# EAGLE board moire_v1.5-routed (EAGLE 9.2.0)
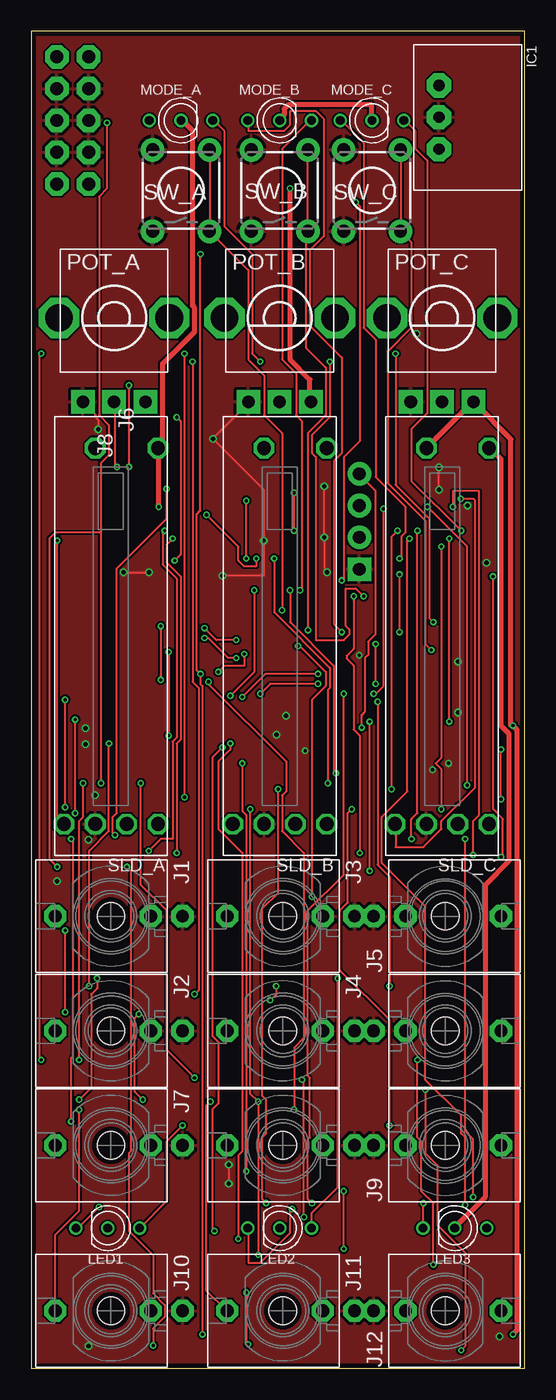
[diagram p0: board, top side]
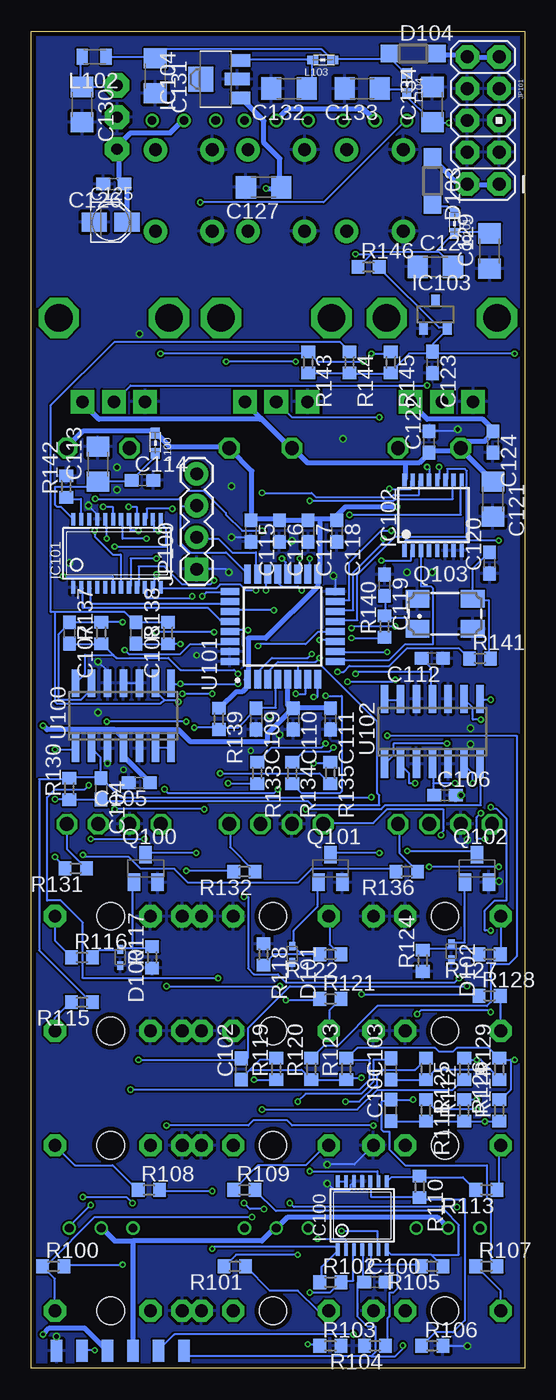
[diagram p1: board, bottom side, seen from below]

Size 39.35 x 106.68 mm. Coordinates in mm from the lower left corner, seen from the top.
Outline: 0,0 39.35,0 39.35,106.68 0,106.68 0,0
Copper layers (1*16): Top 0.035559375mm / dielectric 1.6mm / Bottom 0.035559375mm
Design rules "oshpark-2layer *": minimum track width 6mil, minimum drill 10mil, track to track 6mil, track to pad 6mil, pad to pad 6mil, via to via 6mil, smd to smd 0mil, copper to edge 15mil, drill to drill 6mil, minimum pad ring 5mil, minimum via ring 5mil, stop-mask expansion 2.5mil, vias tented up to drill 0mil, thermal gap 10mil
Net classes: 1 power: width 0.406 mm

## Footprints (pad centres in the part's own frame; a part is rotated, then mirrored left to right if it is on the bottom)
C0603 = smd 1.1 x 1: 1 -0.85,0; 2 0.85,0
C1206 = smd 1.6 x 1.8: 1 -1.4,0; 2 1.4,0
PANASONIC_A = smd 2 x 1.5: + 1.3,0; - -1.3,0
SOD523 = smd 0.7 x 0.5: A 0.7,0; C -0.6,0
SOD123 = smd 1.4 x 1.4: A 1.9,0; C -1.9,0
WE78 = drill 0.9 pad 1.93 octagon: 1 -2.54,0; 2 0,0; 3 2.54,0
TSSOP14_065 = smd 0.305 x 0.991: 1 -1.95,-2.718; 2 -1.3,-2.718; 3 -0.65,-2.718; 4 0,-2.718; 5 0.65,-2.718; 6 1.3,-2.718; 7 1.95,-2.718; 8 1.95,2.718; 9 1.3,2.718; 10 0.65,2.718; 11 0,2.718; 12 -0.65,2.718; 13 -1.3,2.718; 14 -1.95,2.718
TSSOP24_0635 = smd 0.33 x 1: 1 -3.493,-2.725; 2 -2.857,-2.725; 3 -2.223,-2.725; 4 -1.587,-2.725; 5 -0.953,-2.725; 6 -0.318,-2.725; 7 0.318,-2.725; 8 0.953,-2.725; 9 1.587,-2.725; 10 2.223,-2.725; 11 2.857,-2.725; 12 3.493,-2.725; 13 3.493,2.725; 14 2.857,2.725; 15 2.223,2.725; 16 1.587,2.725; 17 0.953,2.725; 18 0.318,2.725; 19 -0.318,2.725; 20 -0.953,2.725; 21 -1.587,2.725; 22 -2.223,2.725; 23 -2.857,2.725; 24 -3.493,2.725
TSSOP16_065 = smd 0.35 x 1: 1 -1.95,-2.825; 2 -1.3,-2.825; 3 -0.65,-2.825; 4 0,-2.825; 5 0.65,-2.825; 6 1.3,-2.825; 7 1.95,-2.825; 8 2.6,-2.825; 9 2.6,2.825; 10 1.95,2.825; 11 1.3,2.825; 12 0.65,2.825; 13 0,2.825; 14 -0.65,2.825; 15 -1.3,2.825; 16 -1.95,2.825
DBZ_R-PDSO-G3 = smd 0.7 x 1: 1 -0.95,-1.1; 2 0.95,-1.1; 3 0,1.1
SOT89 = smd 1 x 1.5: 1 -1.499,-1.981; 3 1.499,-1.981 | smd 1 x 2: 2 0,-1.727 | smd 2 x 2: 2@1 0,1.194
WQP_PJ_301M6 = drill 1.016 pad 1.778 octagon: P1 0,-5.715; P2 0,-3.175; P3 0,4.445 | hole 2.2: 0,0
1X04 = drill 1.016 pad 1.88 square: 1 0,0 | drill 1.016 pad 1.88: 2 2.54,0; 3 5.08,0; 4 7.62,0
2X5-PTH = drill 1.016 pad 1.88 octagon: 1 -1.27,5.08; 2 1.27,5.08; 3 -1.27,2.54; 4 1.27,2.54; 5 -1.27,0; 6 1.27,0; 7 -1.27,-2.54; 8 1.27,-2.54; 9 -1.27,-5.08; 10 1.27,-5.08
0603 = smd 0.85 x 0.7: 1 -0.9,0; 2 0.7,0
L2012C = smd 0.9 x 1.25: 1 -0.9,0; 2 1,0
LED-BICOLOR-THROUGHHOLE-LUMEX = drill 0.7: A 0,0; GREEN_C 2.54,0; RED_C -2.54,0
ALPS_POT_VERTICAL = drill 1 pad 1.88 square: P$1 -2.5,6.7; P$2 0,6.7; P$3 2.5,6.7 | drill 2.2 pad 3.175 octagon: P$4 -4.4,0; P$5 4.4,0
SOT23-BEC = smd 1 x 1.4: B -0.95,-1.1; C 0,1.1; E 0.95,-1.1
CTS406 = smd 1.9 x 1.4: 1 -2.2,-1.2; 2 2.2,-1.2; 3 2.2,1.2; 4 -2.2,1.2
R0603 = smd 1 x 1.1: 1 -0.85,0; 2 0.85,0
BOURNS_SLIDER = drill 1.1 octagon: 1 -15,1.25; 2 -15,3.75; 3 15,1.25; B 15,-3.75; DUMMY -15,-1.25; E -15,-3.75
TACTILE-PTH = drill 1.016 pad 1.88: 1 -3.251,2.261; 2 3.251,2.261; 3 -3.251,-2.261; 4 3.251,-2.261
SO14 = smd 0.6 x 2.2: 1 -3.81,-2.6; 2 -2.54,-2.6; 3 -1.27,-2.6; 4 0,-2.6; 5 1.27,-2.6; 6 2.54,-2.6; 7 3.81,-2.6; 8 3.81,2.6; 9 2.54,2.6; 10 1.27,2.6; 11 0,2.6; 12 -1.27,2.6; 13 -2.54,2.6; 14 -3.81,2.6
QFP80P900X900X160-32N = smd 1.5 x 0.55: 1 -4.2,2.8; 2 -4.2,2; 3 -4.2,1.2; 4 -4.2,0.4; 5 -4.2,-0.4; 6 -4.2,-1.2; 7 -4.2,-2; 8 -4.2,-2.8; 17 4.2,-2.8; 18 4.2,-2; 19 4.2,-1.2; 20 4.2,-0.4; 21 4.2,0.4; 22 4.2,1.2; 23 4.2,2; 24 4.2,2.8 | smd 0.55 x 1.5: 9 -2.8,-4.2; 10 -2,-4.2; 11 -1.2,-4.2; 12 -0.4,-4.2; 13 0.4,-4.2; 14 1.2,-4.2; 15 2,-4.2; 16 2.8,-4.2; 25 2.8,4.2; 26 2,4.2; 27 1.2,4.2; 28 0.4,4.2; 29 -0.4,4.2; 30 -1.2,4.2; 31 -2,4.2; 32 -2.8,4.2
6X1-SMD-TESTPAD = smd 0.914 x 1.778: 1 0,0.123; 2 -2.032,0.123; 3 -4.064,0.123; 4 -6.096,0.123; 5 -8.128,0.123; 6 -10.16,0.123

## Placement (x,y rotation side)
C100  100n  [C0603]  11.94,6.86 0 bottom
C101  100p  [C0603]  10.67,20.57 90 bottom
C102  100p  [C0603]  22.61,23.88 90 bottom
C103  100p  [C0603]  10.67,23.88 90 bottom
C104  2.2n  [C0603]  33.78,46.23 270 bottom
C105  100n  [C0603]  30.73,46.74 180 bottom
C106  100n  [C0603]  6.35,45.72 0 bottom
C107  2.2n  [C0603]  36.32,58.67 270 bottom
C108  2.2n  [C0603]  30.99,58.67 270 bottom
C109  100n  [C0603]  21.42,51.82 270 bottom
C110  100n  [C0603]  18.46,51.82 270 bottom
C111  1u  [C0603]  15.49,51.82 270 bottom
C112  100n  [C0603]  7.37,56.64 180 bottom
C113  22u  [C1206]  34.04,72.14 90 bottom
C114  100n  [C0603]  30.48,70.87 0 bottom
C115  100n  [C0603]  21.84,66.8 270 bottom
C116  100n  [C0603]  19.56,66.8 270 bottom
C117  1u  [C0603]  17.27,66.8 270 bottom
C118  1u  [C0603]  14.99,66.8 270 bottom
C119  20p  [C0603]  11.18,62.48 270 bottom
C120  20p  [C0603]  2.79,64.26 90 bottom
C121  22u  [C1206]  2.54,69.34 270 bottom
C122  100n  [C0603]  7.62,73.91 90 bottom
C123  1u  [C0603]  7.37,80.26 270 bottom
C124  100n  [C0603]  2.54,73.91 270 bottom
C125  10u  [PANASONIC_A]  33.02,91.44 0 bottom
C126  100n  [C0603]  32.77,94.49 180 bottom
C127  22u  [C1206]  20.83,94.23 180 bottom
C128  22u  [C1206]  7.11,87.88 0 bottom
C129  22u  [C1206]  2.79,89.15 90 bottom
C130  22u  [C1206]  35.31,100.84 270 bottom
C131  22u  [C1206]  29.46,103.12 270 bottom
C132  22u  [C1206]  18.8,102.11 180 bottom
C133  22u  [C1206]  12.95,102.11 180 bottom
C134  22u  [C1206]  7.37,100.84 90 bottom
D100  1N4148  [SOD523]  32.26,32.83 270 bottom
D101  1N4148  [SOD523]  18.54,33.07 270 bottom
D102  1N4148  [SOD523]  5.84,33.27 270 bottom
D103  1N5819HW  [SOD123]  7.37,94.74 270 bottom
D104  1N5819HW  [SOD123]  8.89,104.9 0 bottom
IC1  R-78E3.3-0.5  [WE78]  32.51,99.82 270 top
IC100  LM324PW  [TSSOP14_065]  12.95,12.19 0 bottom
IC101  TLC59281DBQ  [TSSOP24_0635]  32.51,65.02 0 bottom
IC102  4051PW  [TSSOP16_065]  7.62,68.07 0 bottom
IC103  LM4040B25  [DBZ_R-PDSO-G3]  7.11,84.07 0 bottom
IC104  LD2981ABU33  [SOT89]  24.64,102.87 90 bottom
J1  PJ301_THONKICONN6  [WQP_PJ_301M6]  6.35,36.07 90 top
J2  PJ301_THONKICONN6  [WQP_PJ_301M6]  6.35,26.92 90 top
J3  PJ301_THONKICONN6  [WQP_PJ_301M6]  20.07,36.07 90 top
J4  PJ301_THONKICONN6  [WQP_PJ_301M6]  20.07,26.92 90 top
J5  PJ301_THONKICONN6  [WQP_PJ_301M6]  33.02,36.07 270 top
J6  PJ301_THONKICONN6  [WQP_PJ_301M6]  33.02,26.92 270 top
J7  PJ301_THONKICONN6  [WQP_PJ_301M6]  6.35,17.78 90 top
J8  PJ301_THONKICONN6  [WQP_PJ_301M6]  20.07,17.78 90 top
J9  PJ301_THONKICONN6  [WQP_PJ_301M6]  33.02,17.78 270 top
J10  PJ301_THONKICONN6  [WQP_PJ_301M6]  6.35,4.57 90 top
J11  PJ301_THONKICONN6  [WQP_PJ_301M6]  20.07,4.57 90 top
J12  PJ301_THONKICONN6  [WQP_PJ_301M6]  33.02,4.57 270 top
JP100  [1X04]  26.16,63.75 90 bottom
JP101  M05X2PTH  [2X5-PTH]  3.3,99.57 180 bottom
L100  [0603]  29.46,73.91 90 bottom
L101  [0603]  5.59,91.44 90 bottom
L102  33u  [L2012C]  34.29,104.65 180 bottom
L103  [0603]  16,104.39 0 bottom
L104  [0603]  9.4,102.62 90 bottom
LED1  SSL-LX3059IGW-CA  [LED-BICOLOR-THROUGHHOLE-LUMEX]  6.1,11.18 0 top
LED2  SSL-LX3059IGW-CA  [LED-BICOLOR-THROUGHHOLE-LUMEX]  19.81,11.18 0 top
LED3  SSL-LX3059IGW-CA  [LED-BICOLOR-THROUGHHOLE-LUMEX]  33.78,11.18 0 top
MODE_A  SSL-LX3059IGW-CA  [LED-BICOLOR-THROUGHHOLE-LUMEX]  11.94,99.57 180 top
MODE_B  SSL-LX3059IGW-CA  [LED-BICOLOR-THROUGHHOLE-LUMEX]  19.81,99.57 180 top
MODE_C  SSL-LX3059IGW-CA  [LED-BICOLOR-THROUGHHOLE-LUMEX]  27.18,99.57 180 top
POT_A  10kB  [ALPS_POT_VERTICAL]  6.6,83.82 180 top
POT_B  10kB  [ALPS_POT_VERTICAL]  19.81,83.82 180 top
POT_C  10kB  [ALPS_POT_VERTICAL]  32.77,83.82 180 top
Q100  MMBT3904  [SOT23-BEC]  30.23,39.88 0 bottom
Q101  MMBT3904  [SOT23-BEC]  15.49,39.88 0 bottom
Q102  MMBT3904  [SOT23-BEC]  3.81,39.88 0 bottom
Q103  8MHz  [CTS406]  6.35,60.2 0 bottom
R100  1.0k  [R0603]  37.59,8.13 0 bottom
R101  1.0k  [R0603]  23.11,8.13 180 bottom
R102  100k  [R0603]  15.49,6.86 0 bottom
R103  69.8k  [R0603]  15.49,1.78 0 bottom
R104  69.8k  [R0603]  11.94,1.78 180 bottom
R105  100k  [R0603]  7.37,8.13 180 bottom
R106  69.8k  [R0603]  7.37,1.78 0 bottom
R107  1.0k  [R0603]  3.05,8.13 0 bottom
R108  1.0k  [R0603]  29.97,14.22 0 bottom
R109  1.0k  [R0603]  22.35,14.22 0 bottom
R110  100k  [R0603]  8.38,14.48 270 bottom
R111  100k  [R0603]  7.87,20.57 270 bottom
R112  20k  [R0603]  4.83,20.57 90 bottom
R113  1.0k  [R0603]  3.05,14.22 180 bottom
R114  30k  [R0603]  2.03,20.57 90 bottom
R115  100k  [R0603]  35.31,29.21 180 bottom
R116  100k  [R0603]  35.31,32.77 0 bottom
R117  100k  [R0603]  29.72,32.77 90 bottom
R118  100k  [R0603]  20.83,33.02 270 bottom
R119  100k  [R0603]  19.81,23.88 90 bottom
R120  20k  [R0603]  17.02,23.88 90 bottom
R121  100k  [R0603]  15.49,29.46 0 bottom
R122  100k  [R0603]  15.49,33.02 180 bottom
R123  30k  [R0603]  14.22,23.88 90 bottom
R124  100k  [R0603]  8.13,32.51 90 bottom
R125  100k  [R0603]  7.87,23.88 270 bottom
R126  20k  [R0603]  4.83,23.88 270 bottom
R127  100k  [R0603]  2.79,33.02 180 bottom
R128  100k  [R0603]  2.79,29.72 0 bottom
R129  30k  [R0603]  2.03,23.88 90 bottom
R130  20k  [R0603]  36.32,46.23 90 bottom
R131  15k  [R0603]  35.81,39.88 180 bottom
R132  15k  [R0603]  22.35,39.62 180 bottom
R133  10k  [R0603]  21.34,47.5 270 bottom
R134  10k  [R0603]  18.54,47.5 270 bottom
R135  10k  [R0603]  15.49,47.5 270 bottom
R136  15k  [R0603]  9.4,39.62 180 bottom
R137  20k  [R0603]  33.78,58.67 90 bottom
R138  20k  [R0603]  28.45,58.67 90 bottom
R139  10k  [R0603]  24.38,51.82 270 bottom
R140  100  [R0603]  11.18,59.18 90 bottom
R141  100  [R0603]  3.56,56.64 0 bottom
R142  10k  [R0603]  36.58,70.36 90 bottom
R143  30k  [R0603]  17.27,80.26 270 bottom
R144  30k  [R0603]  13.97,80.26 270 bottom
R145  30k  [R0603]  10.67,80.26 270 bottom
R146  10k  [R0603]  12.45,87.88 0 bottom
SLD_A  20kB  [BOURNS_SLIDER]  6.35,58.42 90 top
SLD_B  20kB  [BOURNS_SLIDER]  19.81,58.42 90 top
SLD_C  20kB  [BOURNS_SLIDER]  32.77,58.42 90 top
SW_A  [TACTILE-PTH]  11.94,93.98 90 top
SW_B  [TACTILE-PTH]  19.81,93.98 90 top
SW_C  [TACTILE-PTH]  27.18,93.98 90 top
U100  MCP6004  [SO14]  32,52.07 0 bottom
U101  STM32F303K8T6  [QFP80P900X900X160-32N]  19.3,59.18 90 bottom
U102  TL074  [SO14]  7.37,50.8 0 bottom
U$1  1X6-SMD-TESTPAD  [6X1-SMD-TESTPAD]  27.18,1.27 0 bottom

## Library data of the parts
C100-C134 R100-R146 = rcl
D100-D104 = diode
IC1 IC104 = og-vreg
IC100 = og-linear
IC101 IC102 = og-ics
IC103 = texas
J1-J12 = og-pj301_variations
JP100 SW_A SW_B SW_C = SparkFun
JP101 = og-header
L100 L101 L103 L104 = wuerth-elektronik
L102 = og-rcl
LED1-LED3 MODE_A MODE_B MODE_C = og-leds
POT_A POT_B POT_C SLD_A SLD_B SLD_C = og-pots
Q100-Q102 = transistor
Q103 = og-crystal
U100 U102 = MusicThingModular
U101 = STM32F303K8T6; AVAILABILITY: Unavailable; DESCRIPTION: Analog and DSP with FPU ARM Cortex-M4 MCU with 64 Kbytes Flash, 72 MHz CPU, CCM, 12-bit ADC 5 MSPS, comparators, op-amp; MF: STMicroelectronics; MP: STM32F303K8T6; PACKAGE: LQFP-32 STMicroelectronics; PRICE: None
U$1 = CUSTOM

## Nets
+3V3 [power]: C115.1 C116.1 C117.1 C118.1 C125.+ C126.1 IC1.3 L100.2 LED1.A LED2.A LED3.A MODE_A.A MODE_B.A MODE_C.A R139.1 SLD_A.B SLD_B.B SLD_C.B U101.1 U101.17 U$1.3
+3V3_A [power]: C105.1 C110.1 C111.1 C121.1 C122.1 C124.1 C127.1 IC102.16 IC104.1 POT_A.P$1 POT_B.P$1 POT_C.P$1 SLD_A.3 SLD_B.3 SLD_C.3 U100.4 U101.5 U$1.4
+12V [power]: D104.A JP101.9 JP101.10
-12V [power]: D103.C JP101.1 JP101.2
A_ADC: R120.2 U101.10
A_CV: C104.2 R130.1 U100.1 U101.6
A_GATE: R133.2 U101.20
A_TRIG: Q100.C U101.25
A_TRIG_IN: J5.P3 R116.1
ADC_TIME_SHAPE: IC102.3 U101.9
AREF_-2.5: C123.1 IC103.2 R114.2 R123.2 R129.2 R143.2 R144.2 R145.2 R146.2 U$1.5
B_ADC: R126.2 U101.11
B_CV: C108.2 R138.1 U100.8 U101.7
B_CV_IN: J4.P3 R121.2
B_GATE: R134.2 U101.21
B_TRIG: Q101.C U101.14
B_TRIG_IN: J3.P3 R122.1
C_ADC: R112.2 U101.12
C_CV: C107.2 R137.1 U100.14 U101.8
C_GATE: R135.2 U101.22
C_TRIG: Q102.C U101.15
C_TRIG_IN: J1.P3 R127.1
GND: C100.2 C105.2 C106.2 C109.2 C110.2 C111.2 C112.1 C113.2 C114.2 C115.2 C116.2 C117.2 C118.2 C119.1 C120.1 C121.2 C122.2 C123.2 C124.2 C125.- C126.2 C127.2 C128.1 C129.1 C130.2 C131.2 C132.2 C133.2 C134.2 D100.A D101.A D102.A IC1.2 IC100.11 IC100.12 IC101.1 IC101.21 IC102.6 IC102.7 IC102.8 IC103.1 IC104.2 J1.P1 J1.P2 J2.P1 J2.P2 J3.P1 J3.P2 J4.P1 J4.P2 J5.P1 J5.P2 J6.P1 J6.P2 J7.P1 J8.P1 J9.P1 J10.P1 J11.P1 J12.P1 JP100.1 JP101.3 JP101.4 JP101.5 JP101.6 JP101.7 JP101.8 POT_A.P$3 POT_B.P$3 POT_C.P$3 Q100.E Q101.E Q102.E Q103.2 Q103.4 R103.2 R104.2 R106.2 R117.1 R118.1 R124.1 R142.2 SLD_A.1 SLD_B.1 SLD_C.1 SW_A.1 SW_A.2 SW_B.1 SW_B.2 SW_C.1 SW_C.2 U100.3 U100.5 U100.10 U100.11 U100.12 U101.16 U101.31 U101.32 U102.3 U102.5 U102.10 U102.12 U$1.6
LEDS_SCK: IC101.3 U101.26
LEDS_SIN: IC101.2 U101.28
N$1: R131.1 SLD_C.E
N$2: J9.P3 R108.1
N$3: D103.A L101.2
N$4: C131.1 D104.C L102.1 L103.2 L104.2
N$5: C132.1 IC104.3 L103.1
N$6: IC100.13 IC100.14
N$7: J11.P3 R101.1 R125.1
N$8: C103.1 R125.2 R126.1 R129.1 U102.6
N$9: R141.1 U101.2
N$10: R140.1 U101.3
N$11: C120.2 Q103.3 R141.2
N$12: C119.2 Q103.1 R140.2
N$13: J8.P3 R109.1
N$14: U102.13 U102.14
N$15: C103.2 R101.2 U102.7
N$16: IC100.1 R102.1 R108.2
N$17: J10.P3 R107.1 R111.1
N$18: C101.1 R111.2 R112.1 R114.1 U102.9
N$19: C101.2 R107.2 U102.8
N$20: J7.P3 R113.1
N$21: J2.P3 R128.2
N$22: J6.P3 R115.2
N$24: IC100.3 R102.2 R103.1
N$25: IC100.2 R133.1
N$26: IC100.7 R105.1 R109.2
N$28: IC100.5 R104.1 R105.2
N$29: IC100.6 R134.1
N$30: IC100.8 R110.1 R113.2
N$32: IC101.11 MODE_B.GREEN_C
N$33: IC101.10 MODE_A.RED_C
N$34: IC101.12 MODE_B.RED_C
N$35: IC101.7 MODE_C.RED_C
N$36: IC101.8 MODE_C.GREEN_C
N$37: IC101.15 LED2.RED_C
N$38: IC101.16 LED2.GREEN_C
N$39: IC101.13 LED1.GREEN_C
N$40: IC101.17 LED3.RED_C
N$41: D102.C Q102.B R124.2 R127.2
N$42: IC101.18 LED3.GREEN_C
N$43: IC101.14 LED1.RED_C
N$44: C113.1 C114.1 IC101.24 L100.1
N$45: IC101.19 R136.2
N$46: IC101.20 R132.2
N$47: IC101.6 R131.2
N$48: IC102.1 SLD_A.2
N$49: R132.1 SLD_B.E
N$50: R136.1 SLD_A.E
N$51: IC102.2 POT_B.P$2
N$53: IC102.12 POT_A.P$2
N$54: IC102.13 POT_C.P$2
N$55: IC102.14 SLD_C.2
N$56: IC102.15 SLD_B.2
N$57: C104.1 R115.1 R130.2 R145.1 U100.2
N$58: C108.1 R121.1 R138.2 R144.1 U100.9
N$59: C107.1 R128.1 R137.2 R143.1 U100.13
N$61: IC100.10 R106.1 R110.2
N$62: D101.C Q101.B R118.2 R122.2
N$64: IC100.9 R135.1
N$65: D100.C Q100.B R116.2 R117.2
N$66: C130.1 IC1.1 L102.2
N$68: IC101.23 R142.1
N$86: J12.P3 R100.1 R119.1
N$87: C102.1 R119.2 R120.1 R123.1 U102.2
N$93: C102.2 R100.2 U102.1
N$101: IC101.9 MODE_A.GREEN_C
N_U: U100.6 U100.7
POTS_ADDR_A: IC102.11 U101.13
POTS_ADDR_B: IC102.10 U101.18
POTS_ADDR_C: IC102.9 U101.19
RESET: C109.1 JP100.4 R139.2 U101.4
SW_MODE_A: SW_A.3 SW_A.4 U101.27
SW_MODE_B: SW_B.3 SW_B.4 U101.29
SW_MODE_C: SW_C.3 SW_C.4 U101.30
SWCLK: JP100.3 U101.24
SWDIO: JP100.2 U101.23
VCC: C100.1 C106.1 C133.1 C134.1 IC100.4 L104.1 U102.4 U$1.1
VEE: C112.2 C128.2 C129.2 L101.1 R146.1 U102.11 U$1.2

## Tracks (layer width: path | path; a pad name or v marks a point on that pad's centre or on a via)
+3V3  (via drill 0.25)
  Top 0.406: MODE_B.A 19.84,99.69 20.16,100.01 20.16,100.49 20.48,100.81 27.15,100.81 27.15,99.69 MODE_C.A | v10.16,68.74 10.16,73.34 SLD_A.B 10.32,73.34 10.48,73.5 10.48,80.17 13.02,82.71 13.02,84.61 12.86,84.77 12.86,98.74 12.06,99.54 MODE_A.A | LED3.A 33.81,11.27 36.2,13.65 36.2,38.58 38.1,40.48 38.1,50.64 37.47,51.28 37.47,72.55 36.67,73.34 SLD_C.B
  Bottom 0.406: 31.27,10.16 31.27,1.43 U$1.3 | 31.27,10.16 32.7,10.16 33.66,11.11 LED3.A | LED1.A 6.99,12.06 18.89,12.06 19.68,11.27 LED2.A 20,11.11 20.95,10.16 31.27,10.16 | MODE_A.A 12.86,100.49 18.89,100.49 MODE_B.A | C125.+ 31.75,91.44 31.75,94.3 31.91,94.3 C126.1 32.07,94.61 32.38,94.93 32.38,97.16 IC1.3 32.54,97.47 31.43,98.58 28.26,98.58 27.3,99.54 MODE_C.A | SLD_C.B 36.51,73.5 35.24,74.77 29.53,74.77 L100.2 29.37,74.61 28.26,73.5 23.65,73.5 SLD_B.B 23.5,73.34 21.75,71.6 21.75,67.94 C115.1 21.75,67.79 19.68,67.79 C116.1 19.37,67.63 17.46,67.63 C117.1 17.14,67.79 16.35,67.79 | R139.1 24.29,52.7 23.02,53.98 22.54,53.98 22.23,54.29 22.23,54.93 U101.1 22.07,55.09 22.07,58.26 20.64,58.26 16.51,62.39 16.51,63.18 U101.17 16.35,63.5 16.35,67.79 | 16.35,67.79 15.08,67.79 C118.1 15.08,67.94 14.29,68.74 v10.16,68.74
+3V3_A  (via drill 0.25)
  Top 0.406: SLD_C.3 31.59,73.5 35.24,77.15 POT_C.P$1 35.4,76.99 38.26,74.14 38.26,51.28 v38.42,51.28 38.73,50.96 38.73,3.02 v38.42,2.7 | v20.64,94.14 20.64,80.49 22.23,78.9 22.23,77.15 POT_B.P$1
  Bottom 0.406: IC104.1 22.54,101.28 20.8,99.54 20.8,97.79 19.53,96.52 19.53,94.3 C127.1 19.53,94.14 v20.64,94.14 | 9.53,72.23 9.53,70.96 IC102.16 | 9.53,72.23 8.41,72.23 7.62,73.03 C122.1 7.46,73.18 5.08,73.18 SLD_A.3 | SLD_A.3 5.08,73.5 4.6,73.98 3.17,73.98 2.54,74.61 C124.1 2.54,74.93 3.33,75.72 7.78,75.72 9.05,76.99 POT_A.P$1 | C121.1 2.54,70.8 5.08,73.34 SLD_A.3 | 9.53,72.23 17.3,72.23 18.41,73.34 SLD_B.3 18.73,73.5 21.03,75.8 | 21.03,75.8 22.23,76.99 POT_B.P$1 | POT_C.P$1 35.24,76.99 33.97,75.72 21.11,75.72 21.03,75.8 | C111.1 15.56,52.7 18.41,52.7 C110.1 | U101.5 18.89,54.93 18.89,52.86 18.41,52.86 C110.1 | C105.1 30,46.83 31.91,48.74 31.91,49.37 U100.4 32.07,49.53 32.07,50.32 32.7,50.96 | v38.42,2.7 37.91,3.21 35.12,3.21 33.34,1.43 U$1.4 | v38.42,51.28 38.1,50.96 32.7,50.96 | 32.7,50.96 27.62,50.96 26.67,50.01 20.48,50.01 20.48,50.64 18.57,52.55 C110.1
+12V
  Bottom 0.406: D104.A 6.99,104.78 4.6,104.78 JP101.10 4.45,104.62 2.06,104.62 JP101.9
-12V
  Bottom 0.406: D103.C 7.3,96.52 5.4,94.61 4.6,94.61 JP101.2 4.45,94.46 2.06,94.46 JP101.1
A_ADC  (via drill 0.25)
  Top 0.152: v10.95,57.15 v10.95,50.48
  Bottom 0.152: v10.95,50.48 0.64,50.48 0.64,32.86 1.27,32.23 2.7,32.23 2.7,29.21 3.02,28.89 11.75,28.89 14.92,25.72 16.03,25.72 16.99,24.77 R120.2 | v10.95,57.15 15.08,57.15 U101.10
A_CV  (via drill 0.25)
  Top 0.152: v37.47,45.4 v37.47,49.37
  Bottom 0.152: U101.6 18.1,55.09 18.1,56.04 16.19,56.04 11.75,51.59 11.75,45.88 11.59,45.72 11.59,44.93 16.99,44.93 17.3,45.24 33.66,45.24 C104.2 33.81,45.4 36.2,45.4 R130.1 36.35,45.4 v37.47,45.4 | v37.47,49.37 35.88,49.37 U100.1
A_GATE  (via drill 0.25)
  Top 0.152: v23.65,46.67 23.65,54.13 23.81,54.29 23.81,55.88 19.37,60.33 v19.37,64.61
  Bottom 0.152: v23.65,46.67 21.43,46.67 R133.2 | v19.37,64.61 19.05,64.29 19.05,63.5 U101.20
A_TRIG  (via drill 0.25)
  Top 0.152: v26.19,41.12 26.19,50.48 25.72,50.96 25.72,56.07 25.15,56.64 25.15,56.83 25.72,57.4 v25.72,61.59
  Bottom 0.152: v26.19,41.12 30.16,41.12 Q100.C | v25.72,61.59 25.4,61.91 23.65,61.91 U101.25
A_TRIG_IN
  Bottom 0.152: J5.P3 37.47,34.13 36.2,32.86 R116.1
ADC_TIME_SHAPE
  Bottom 0.152: IC102.3 8.26,65.25 8.26,62.39 7.46,62.39 7.3,62.23 7.3,57.78 9.53,57.78 10.79,56.52 15.08,56.52 U101.9
AREF_-2.5  (via drill 0.25)
  Top 0.152: v34.29,1.43 34.61,1.75 34.61,9.21 32.38,11.43 32.38,16.19 31.43,17.14 v31.43,22.23 | v0.79,80.96 0.64,80.8 0.64,24.77 v0.79,24.61
  Bottom 0.152: 13.97,79.38 10.79,79.38 R145.2 10.64,79.53 9.21,80.96 7.46,80.96 C123.1 | 13.97,79.38 17.14,79.38 R143.2 | 13.97,79.38 R144.2 | C123.1 7.3,81.12 7.3,81.76 6.19,82.87 IC103.2 6.19,83.03 6.83,83.03 11.59,87.79 R146.2 | 1.11,24.61 1.11,22.23 1.91,21.43 R114.2 | 1.11,24.61 1.91,24.61 R129.2 2.06,24.77 2.86,25.56 5.4,25.56 5.71,25.24 6.83,25.24 7.14,25.56 13.34,25.56 14.13,24.77 R123.2 14.13,24.61 12.38,24.61 12.38,23.02 13.18,22.23 v31.43,22.23 | v34.29,1.43 35.24,1.43 U$1.5 | v0.79,80.96 7.3,80.96 C123.1 | 1.11,24.61 v0.79,24.61
B_ADC  (via drill 0.25)
  Top 0.152: v20.95,20.64 20.95,25.56 21.75,26.35 21.75,41.12 20,42.86 20,45.72 20.32,46.04 20.32,48.42 14.13,54.61 v14.13,54.77 | v10.32,59.21 v10.32,54.93 | v13.81,59.05 14.76,58.1 v16.35,58.1
  Bottom 0.152: v20.95,20.64 13.34,20.64 11.75,22.23 5.71,22.23 4.92,23.02 R126.2 | v14.13,54.77 10.48,54.77 v10.32,54.93 | v10.32,59.21 13.65,59.21 v13.81,59.05 | v16.35,58.1 15.24,58.1 U101.11
B_CV  (via drill 0.25)
  Top 0.152: v18.26,53.82 19.05,54.61 v22.86,54.61 | v27.46,54.61 v27.46,57.78
  Bottom 0.152: C108.2 30.96,57.78 28.57,57.78 R138.1 28.42,57.78 v27.46,57.78 | v18.26,53.82 17.46,53.82 17.46,54.93 U101.7 | v22.86,54.61 v27.46,54.61 28.1,54.61 U100.8
B_CV_IN
  Bottom 0.152: R121.2 14.76,29.37 15.56,28.57 15.56,26.99 J4.P3
B_GATE  (via drill 0.25)
  Top 0.152: v15.88,53.66 17.78,55.56 v17.78,62.07
  Bottom 0.152: v15.88,53.66 14.61,53.66 14.61,46.04 14.76,45.88 17.78,45.88 18.41,46.51 R134.2 | v17.78,62.07 18.1,62.39 19.37,62.39 19.68,62.71 19.68,63.34 U101.21
B_TRIG  (via drill 0.25)
  Top 0.152: v11.59,41.12 11.59,49.85 11.91,50.16 11.91,63.18 10.79,64.29 10.79,65.72 v11.27,66.2
  Bottom 0.152: v11.59,41.12 15.4,41.12 Q101.C | v11.27,66.2 11.27,65.88 13.65,63.5 13.65,60.48 15.08,60.48 U101.14
B_TRIG_IN
  Bottom 0.152: R122.1 14.76,33.02 15.56,33.81 15.56,36.04 J3.P3
C_ADC  (via drill 0.25)
  Top 0.152: v3.81,21.43 4.76,22.38 4.76,29.84 5.24,30.32 v5.24,31.11 | v22.38,37.62 22.38,53.34 23.5,54.45 23.5,55.56 21.43,57.63 v21.27,57.63
  Bottom 0.152: v3.81,21.43 4.76,21.43 R112.2 | v5.24,31.11 5.56,30.8 19.05,30.8 19.68,31.43 21.59,31.43 22.07,31.91 22.07,37.62 v22.38,37.62 | v21.27,57.63 21.11,57.78 17.46,57.78 16.51,58.74 15.24,58.74 U101.12
C_CV  (via drill 0.25)
  Top 0.152: v16.83,53.56 18.67,55.4 v22.86,55.4
  Bottom 0.152: C107.2 36.2,57.78 33.81,57.78 R137.1 33.66,57.78 32.8,56.93 | v16.83,53.56 16.51,53.56 16.51,54.93 U101.8 | v22.86,55.4 23.18,55.72 27.46,55.72 28.42,56.67 32.54,56.67 32.8,56.93 | 32.8,56.93 35.08,56.93 35.08,55.4 35.72,54.77 U100.14
C_GATE  (via drill 0.25)
  Top 0.152: v24.29,47.47 24.13,47.62 24.13,56.04 20.64,59.53 v20.64,62.07
  Bottom 0.152: v24.29,47.47 16.35,47.47 15.56,46.67 R135.2 | v20.64,62.07 20.64,63.34 U101.22
C_TRIG  (via drill 0.25)
  Top 0.152: v9.37,41.27 10.32,42.23 11.27,42.23 11.27,50.01 11.59,50.32 11.59,63.02 10.48,64.14 10.48,66.67 v10.64,66.83
  Bottom 0.152: v9.37,41.27 3.97,41.27 3.81,41.12 Q102.C | v10.64,66.83 11.43,66.83 13.97,64.29 13.97,61.28 15.08,61.28 U101.15
C_TRIG_IN
  Bottom 0.152: J1.P3 1.91,33.02 R127.1
GND  (via drill 0.25, 0.28, 0.35)
  Top 0.152: 4.57,2.03 v4.57,1.78 | v15.75,16.26 v15.75,14.73 | v7.37,63.5 v9.4,63.5 | POT_A.P$3 5.09,76.13 5.09,75.92 5.33,75.67 v5.33,74.93 | POT_B.P$3 17.31,77 v14.48,74.17 18.54,70.1 v18.54,66.04 18.54,63.25 v15.24,63.25 | v23.6,63.5 23.37,63.73 v23.37,66.29 v23.37,70.36 | v32.51,70.1 v32.51,71.88
  Bottom 0.152: U$1.6 v37.34,2.54 | R106.2 v4.57,1.78 | J7.P1 13.59,16.26 v15.75,16.26 | v15.75,14.73 15.7,14.73 15.15,14.19 14.01,14.19 13.87,14.32 13.87,14.64 IC100.12 | v5.33,74.93 5.5,74.76 C122.2 | v15.24,63.25 15.1,63.11 U101.16 | C117.2 18.45,65.95 v18.54,66.04 18.63,65.95 C116.2 C115.2 22.19,66.29 v23.37,66.29 | v23.6,63.5 23.85,63.75 JP100.1 | 34.61,68.65 v34.8,68.83 34.1,68.14 IC101.21 | v34.04,56.39 33.27,55.63 U100.12 | U100.11 U100.10
  other vias: 30.73,82.55 36.32,64.26 4.32,49.78 4.32,51.05 5.08,45.72 4.57,42.16 2.03,38.86 20.32,52.07 19.56,50.55 34.04,52.32 33.27,48.26 21.84,49.28 26.16,56.9 32,47.75
  pour Bottom: 39.88,106.93 0,106.93 -0.76,106.17 -0.76,-0.25 0,-1.02 39.88,-1.02
  pour Top: 0,-1.78 39.37,-1.78 40.39,-0.76 40.39,107.19 39.62,107.95 -0.25,107.95 -2.03,106.17 -2.03,0.25
LEDS_SCK
  Bottom 0.152: IC101.3 34.61,62.23 34.61,60.96 23.81,60.96 23.65,61.12 U101.26
LEDS_SIN
  Bottom 0.152: IC101.2 35.24,62.23 35.24,60.64 25.24,60.64 24.29,59.69 23.65,59.69 U101.28
N$1
  Bottom 0.152: R131.1 35.08,40.01 36.51,41.43 36.51,43.34 SLD_C.E
N$2
  Bottom 0.152: J9.P3 35.88,16.19 32.86,16.19 30.96,14.29 R108.1
N$3
  Bottom 0.152: L101.2 5.71,92.23 6.19,92.71 7.3,92.71 D103.A
N$4
  Bottom 0.152: L102.1 33.34,104.62 29.53,104.62 C131.1 29.37,104.62 28.73,105.25 16.19,105.25 15.4,104.46 L103.2 15.24,104.46 10.64,104.46 | 10.64,104.46 9.53,103.35 L104.2 | 10.64,104.46 10.64,104.78 D104.C 10.64,104.46
N$5
  Bottom 0.152: IC104.3 22.54,104.46 16.99,104.46 L103.1 16.99,104.3 16.99,102.55 17.3,102.23 C132.1
N$6
  Bottom 0.152: IC100.13 14.29,14.92 14.76,14.92 IC100.14
N$7  (via drill 0.25)
  Top 0.152: v14.29,21.27 13.97,20.95 13.97,6.19 15.56,4.6 J11.P3
  Bottom 0.152: R101.1 22.23,8.1 20.32,6.19 18.1,6.19 16.51,4.6 15.72,4.6 J11.P3 | v14.29,21.27 13.18,21.27 11.91,22.54 11.75,22.54 11.75,23.34 11.27,23.81 8.73,23.81 7.94,24.61 R125.1
N$8  (via drill 0.25)
  Top 0.152: v4.13,46.67 4.13,43.97 3.81,43.66 v3.81,24.61
  Bottom 0.152: C103.1 10.64,23.02 7.94,23.02 R125.2 7.78,23.18 7.14,23.81 2.7,23.81 | 2.7,23.81 3.49,24.61 v3.81,24.61 4.76,24.61 R126.1 | 2.7,23.81 2.06,23.18 R129.1 | v4.13,46.67 4.13,47.47 4.76,48.1 U102.6
N$9  (via drill 0.25)
  Top 0.152: v14.92,55.56 15.4,56.04 16.99,56.04 v16.99,56.99
  Bottom 0.152: v14.92,55.56 14.45,55.56 13.97,56.04 10.79,56.04 9.37,57.47 5.24,57.47 4.45,56.67 R141.1 | v16.99,56.99 17.3,56.67 20.16,56.67 21.27,55.56 21.27,55.09 U101.2
N$10  (via drill 0.25)
  Top 0.152: v13.81,58.26 14.13,58.26 15.72,56.67 v16.35,56.67
  Bottom 0.152: v13.81,58.26 11.27,58.26 R140.1 | v16.35,56.67 16.67,56.36 19.68,56.36 20.48,55.56 20.48,55.09 U101.3
N$11
  Bottom 0.152: R141.2 2.86,56.67 2.86,61.28 4.13,61.28 Q103.3 4.13,61.44 4.13,63.82 2.86,65.09 C120.2
N$12
  Bottom 0.152: C119.2 11.11,61.59 11.11,60.17 R140.2 11.11,60.01 10.95,59.85 9.37,59.85 8.57,59.05 Q103.1
N$13
  Bottom 0.152: J8.P3 15.88,17.78 17.46,16.19 21.27,16.19 23.18,14.29 R109.1
N$14
  Bottom 0.152: U102.13 10,53.34 11.11,53.34 U102.14
N$15  (via drill 0.25)
  Top 0.152: v18.1,9.05 v18.1,21.27 17.46,21.91 v17.46,44.61
  Bottom 0.152: v18.1,9.05 23.02,9.05 23.81,8.26 R101.2 | v18.1,21.27 17.46,21.91 13.02,21.91 12.06,22.86 12.06,24.61 10.79,24.61 C103.2 | v17.46,44.61 11.43,44.61 11.11,44.93 3.49,44.93 3.49,48.1 U102.7
N$16  (via drill 0.25)
  Top 0.152: v24.92,9.53 v24.92,14.13
  Bottom 0.152: R102.1 16.19,6.99 16.19,8.1 14.92,9.37 IC100.1 14.92,9.53 15.08,9.68 24.77,9.68 v24.92,9.53 | v24.92,14.13 29.05,14.13 R108.2
N$17  (via drill 0.25)
  Top 0.152: v3.81,20.64 3.81,12.54 1.91,10.64 J10.P3
  Bottom 0.152: J10.P3 1.91,6.19 3.81,8.1 R107.1 | v3.81,20.64 7.14,20.64 7.78,21.27 R111.1
N$18  (via drill 0.25)
  Top 0.152: v3.49,44.29 v3.49,51.75 | v3.17,42.23 3.33,42.07 3.33,24.92 3.17,24.77 v3.17,19.68
  Bottom 0.152: R114.1 2.06,19.68 v3.17,19.68 4.76,19.68 R112.1 4.92,19.68 7.78,19.68 R111.2 7.94,19.68 10.64,19.68 C101.1 | v3.49,51.75 4.13,51.75 4.13,52.7 4.76,53.34 U102.9 | v3.49,44.29 3.81,43.97 3.81,42.23 v3.17,42.23
N$19  (via drill 0.25)
  Top 0.152: v2.7,44.77 v2.7,53.34 | v2.7,28.42 v2.7,34.92 | v8.57,28.26 8.26,27.94 8.26,22.07 v8.89,21.43
  Bottom 0.152: R107.2 2.22,8.26 2.7,8.73 2.7,13.34 3.02,13.65 3.02,16.19 9.53,16.19 10.79,17.46 10.79,18.89 11.27,18.89 11.43,19.05 11.43,21.27 10.79,21.27 C101.2 10.64,21.43 v8.89,21.43 | v2.7,53.34 3.49,53.34 U102.8 | v2.7,44.77 2.54,44.61 2.22,44.61 1.43,43.81 1.43,37.31 2.38,37.31 3.17,36.51 3.17,34.92 v2.7,34.92 | v2.7,28.42 2.86,28.57 8.26,28.57 v8.57,28.26
N$20
  Bottom 0.152: J7.P3 2.06,17.78 2.06,14.29 R113.1
N$21
  Bottom 0.152: J2.P3 1.91,29.69 R128.2
N$22
  Bottom 0.152: J6.P3 37.47,27.94 36.2,29.21 R115.2
N$24  (via drill 0.25)
  Top 0.152: v17.3,1.91 17.14,2.06 v17.14,6.03
  Bottom 0.152: IC100.3 13.65,9.37 13.65,6.99 14.61,6.99 R102.2 14.76,6.83 15.56,6.03 v17.14,6.03 | v17.3,1.91 16.35,1.91 R103.1
N$25  (via drill 0.25)
  Top 0.152: v16.51,10.32 16.51,16.99 16.83,17.3 16.83,41.12 14.92,43.02 14.92,48.42 15.88,49.37 v15.88,49.85
  Bottom 0.152: v16.51,10.32 14.29,10.32 14.29,9.53 IC100.2 | v15.88,49.85 16.19,49.53 20.16,49.53 21.27,48.42 R133.1
N$26
  Bottom 0.152: 7.46,9.05 10.64,9.05 10.95,9.37 IC100.7 | 7.46,9.05 6.67,8.26 R105.1 | 7.46,9.05 5.24,9.05 5.24,11.43 6.35,12.54 19.84,12.54 21.43,14.13 R109.2
N$28
  Bottom 0.152: 10.16,8.26 8.26,8.26 R105.2 | 10.16,8.26 12.22,8.26 12.22,9.37 IC100.5 | 10.16,8.26 10.16,6.35 10.48,6.03 10.79,6.03 10.79,4.13 10.95,3.97 10.95,1.91 R104.1
N$29  (via drill 0.25)
  Top 0.152: v14.61,10.95 14.45,11.11 14.45,20.64 14.92,21.11 14.92,26.04 14.45,26.51 14.45,48.74 v15.24,49.53
  Bottom 0.152: v14.61,10.95 11.75,10.95 11.75,9.53 IC100.6 | v15.24,49.53 15.56,49.21 17.62,49.21 18.41,48.42 R134.1
N$30
  Bottom 0.152: IC100.8 10.95,14.92 10.64,15.24 8.41,15.24 R110.1 8.26,15.24 4.92,15.24 3.97,14.29 R113.2
N$32  (via drill 0.25)
  Top 0.152: v29.37,58.74 v29.37,63.34 | v24.77,58.74 24.13,59.37 24.13,72.39 24.77,73.03 24.77,80.64 22.23,83.19 22.23,89.22 23.34,90.33 23.34,99.69 22.7,100.33 20.64,100.33 20.64,99.22 20.16,98.74 17.3,98.74 17.3,99.54 MODE_B.GREEN_C
  Bottom 0.152: v29.37,63.34 29.53,63.34 29.53,62.39 IC101.11 | v24.77,58.74 v29.37,58.74
N$33  (via drill 0.25)
  Top 0.152: v26.51,61.59 25.88,62.23 25.08,62.23 25.08,59.21 25.4,58.9 25.4,58.58 24.92,58.1 22.7,58.1 22.7,72.71 22.38,73.03 22.38,74.45 23.81,75.88 v23.81,80.33 | v18.26,80.33 17.62,80.96 17.62,88.9 15.4,91.12 15.4,98.74 14.61,99.54 MODE_A.RED_C
  Bottom 0.152: v26.51,61.59 26.67,61.44 30.16,61.44 30.16,62.23 IC101.10 | v18.26,80.33 v23.81,80.33
N$34  (via drill 0.25)
  Top 0.152: v21.43,62.07 21.59,62.23 21.59,75.56 21.11,76.04 21.11,79.38 20,80.49 20,97.31 22.23,99.54 MODE_B.RED_C
  Bottom 0.152: v21.43,62.07 22.23,62.07 22.7,62.55 24.29,62.55 24.61,62.23 28.89,62.23 IC101.12
N$35  (via drill 0.25)
  Top 0.152: v34.29,66.83 30.32,70.8 30.32,74.93 31.59,76.2 31.59,96.36 30.64,97.31 30.64,98.74 29.84,99.54 MODE_C.RED_C
  Bottom 0.152: v34.29,66.83 34.29,66.36 32.86,64.93 32.23,64.93 32.23,62.39 IC101.7
N$36  (via drill 0.25)
  Top 0.152: v29.37,64.61 29.53,64.77 29.53,66.36 29.84,66.67 29.84,68.74 27.46,71.12 27.46,82.07 26.51,83.03 26.51,97.79 24.77,99.54 MODE_C.GREEN_C
  Bottom 0.152: v29.37,64.61 31.43,64.61 31.43,62.39 IC101.8
N$37  (via drill 0.25)
  Top 0.152: v28.1,68.58 28.1,54.45 27.46,53.82 v27.3,53.82 | v24.92,53.82 24.92,39.37 22.07,36.51 22.07,23.34 22.23,23.18 22.23,18.41 22.07,18.26 22.07,13.49 v22.38,13.18 | v20.8,12.7 20.64,12.54 20.64,10.79 18.26,8.41 17.3,8.41 17.3,11.11 LED2.RED_C
  Bottom 0.152: v28.1,68.58 30.16,68.58 30.16,67.79 IC101.15 | v24.92,53.82 v27.3,53.82 | v22.38,13.18 21.91,12.7 v20.8,12.7
N$38  (via drill 0.25)
  Top 0.152: v31.59,68.74 34.77,65.56 v34.77,46.51 | v24.45,31.11 24.45,14.45 22.38,12.38 22.38,11.27 LED2.GREEN_C
  Bottom 0.152: v31.59,68.74 30.96,68.74 30.96,67.79 IC101.16 | v34.77,46.51 35.08,46.2 37.47,46.2 38.1,45.56 38.1,37.31 36.99,37.31 35.24,35.56 35.24,31.11 v24.45,31.11
N$39  (via drill 0.25)
  Top 0.152: v32.7,65.56 32.7,48.7 32.26,48.26 32.7,47.82 v32.7,44.61 | v25.56,44.61 25.24,44.29 25.24,37.15 24.61,36.51 24.61,31.75 28.57,27.78 v28.57,19.37 | v12.06,19.37 10.79,18.1 10.79,13.34 LED1.GREEN_C
  Bottom 0.152: v32.7,65.56 28.57,65.56 28.57,66.99 28.89,67.31 28.89,67.63 IC101.13 | v25.56,44.61 v32.7,44.61 | v12.06,19.37 18.54,19.37 18.99,19.81 21.59,19.81 22.04,19.37 v28.57,19.37
N$40  (via drill 0.25)
  Top 0.152: v30.8,66.83 30.8,44.29 30.32,43.81 v30.32,42.23 | v34.61,42.23 34.61,18.89 35.24,18.26 v35.24,13.65 | v31.27,13.18 31.27,11.27 LED3.RED_C
  Bottom 0.152: v30.8,66.83 31.43,66.83 31.43,67.63 IC101.17 | v34.61,42.23 v30.32,42.23 | v35.24,13.65 31.75,13.65 v31.27,13.18
N$41
  Bottom 0.152: 6.19,33.5 5.87,33.81 D102.C 5.71,33.97 4.76,33.97 4.76,38.73 Q102.B | 6.19,33.5 8.1,33.5 R124.2 | 6.19,33.5 4.13,33.5 3.65,33.02 R127.2
N$42  (via drill 0.25)
  Top 0.152: v30.16,66.2 30,66.04 30,46.04 27.94,43.97 27.94,40.32 31.43,36.83 31.43,23.02 34.29,20.16 34.29,18.73 34.61,18.41 v34.61,13.02
  Bottom 0.152: v30.16,66.2 32.07,66.2 32.07,67.63 IC101.18 | v34.61,13.02 36.35,11.27 LED3.GREEN_C
N$43  (via drill 0.25)
  Top 0.152: v29.21,66.83 28.73,66.36 v28.73,46.2 | v19.68,46.2 19.68,37.94 18.41,36.67 18.41,21.75 18.73,21.43 18.73,18.73 18.41,18.41 18.41,13.49 v18.73,13.18 | v5.4,12.86 3.65,11.11 LED1.RED_C
  Bottom 0.152: v29.21,66.83 29.53,66.83 29.53,67.63 IC101.14 | v28.73,46.2 28.42,45.88 20,45.88 v19.68,46.2 | v18.73,13.18 18.41,12.86 v5.4,12.86
N$44
  Bottom 0.152: L100.1 29.46,72.73 C114.1 31.39,70.8 33.97,70.8 C113.1 34.13,70.64 34.45,70.33 37.47,70.33 37.47,68.9 37.31,68.74 36.99,68.74 36.04,67.79 IC101.24
N$45  (via drill 0.25)
  Top 0.152: v33.62,68.74 33.62,70.01 35.72,70.01 35.72,44.13 35.24,43.66 v35.24,40.96
  Bottom 0.152: v33.62,68.74 32.86,68.74 32.86,67.79 IC101.19 | v35.24,40.96 35.08,40.8 31.59,40.8 30.64,39.85 27.94,39.85 26.83,38.73 18.1,38.73 16.99,39.85 10.48,39.85 10.32,39.69 R136.2
N$46  (via drill 0.25)
  Top 0.152: v33.34,51.59 v33.34,66.2 | v26.99,39.69 v26.99,51.59
  Bottom 0.152: v33.34,66.2 33.34,67.63 IC101.20 | v26.99,51.59 v33.34,51.59 | v26.99,39.69 23.34,39.69 R132.2
N$47  (via drill 0.25)
  Top 0.152: v36.83,63.18 36.83,44.61 37.62,43.81 37.62,40.96 v37.47,40.8
  Bottom 0.152: v36.83,63.18 32.86,63.18 32.86,62.39 IC101.6 | v37.47,40.8 36.67,40.01 R131.2
N$48  (via drill 0.25)
  Top 0.152: v2.06,66.04 2.06,43.97 2.54,43.5 SLD_A.2
  Bottom 0.152: v2.06,66.04 9.53,66.04 9.53,65.41 IC102.1
N$49
  Bottom 0.152: R132.1 21.59,39.69 23.5,41.59 23.5,43.34 SLD_B.E
N$50
  Bottom 0.152: R136.1 8.57,39.69 10,41.12 10,43.34 SLD_A.E
N$51  (via drill 0.25)
  Top 0.152: v11.43,64.45 11.91,64.93 11.91,75.56 v11.59,75.88
  Bottom 0.152: v11.43,64.45 9.05,64.45 9.05,65.25 IC102.2 | v11.59,75.88 18.57,75.88 19.68,76.99 POT_B.P$2
N$53  (via drill 0.25)
  Top 0.152: v6.83,71.91 6.67,72.07 6.67,76.99 POT_A.P$2
  Bottom 0.152: v6.83,71.91 6.83,70.96 IC102.12
N$54  (via drill 0.25)
  Top 0.152: v7.78,78.42 v7.78,71.91
  Bottom 0.152: IC102.13 7.62,71.91 v7.78,71.91 | v7.78,78.42 31.43,78.42 32.7,77.15 POT_C.P$2
N$55  (via drill 0.25)
  Top 0.152: v20.95,66.83 v20.95,69.85 | v34.26,69.37 35.27,69.37 35.4,69.25 35.4,46.35 32.7,43.66 32.7,43.02 31.27,41.59 29.05,41.59 29.05,43.34 SLD_C.2
  Bottom 0.152: v20.95,69.85 16.99,69.85 16.67,69.53 10.64,69.53 10.48,69.69 8.41,69.69 8.41,70.8 IC102.14 | v20.95,66.83 22.54,66.83 23.83,68.12 23.83,68.25 25.59,70.01 26.92,70.01 27.56,69.37 v34.26,69.37
N$56  (via drill 0.25)
  Top 0.152: v10.79,70.17 10.79,67.79 6.83,63.82 6.83,44.29 6.51,43.97 6.51,42.7 v6.67,42.55
  Bottom 0.152: v10.79,70.17 9.05,70.17 9.05,70.8 IC102.15 | v6.67,42.55 6.67,42.7 6.51,42.86 6.51,44.61 10.95,44.61 12.06,43.5 16.03,43.5 SLD_B.2
N$57  (via drill 0.25)
  Top 0.152: v12.22,45.56 v12.22,80.96
  Bottom 0.152: R115.1 34.61,29.21 38.73,33.34 38.73,46.99 36.35,46.99 R130.2 36.2,47.15 33.81,47.15 | v12.22,80.96 10.79,80.96 R145.1 | v12.22,45.56 32.23,45.56 33.66,46.99 C104.1 33.81,47.15 | 33.81,47.15 33.81,48.74 34.45,49.37 U100.2
N$58  (via drill 0.25)
  Top 0.152: v19.05,29.37 19.53,29.84 v19.53,30.48 | v28.57,30.48 28.57,39.21 27.62,40.16 v27.62,53.18
  Bottom 0.152: v19.05,29.37 16.35,29.37 R121.1 | v28.57,30.48 v19.53,30.48 | v27.62,53.18 27.78,53.34 28.73,53.34 | 28.73,53.34 29.37,53.98 29.37,54.61 U100.9 | 37.47,60.33 31.91,60.33 31.11,59.53 C108.1 30.96,59.53 28.57,59.53 R138.2 | 37.47,60.33 37.78,60.33 37.78,76.83 32.7,81.92 14.76,81.92 R144.1 | 28.73,53.34 29.05,53.02 37.31,53.02 37.47,53.18 37.47,60.33
N$59  (via drill 0.25)
  Top 0.152: v13.02,29.84 13.34,30.16 13.34,54.29 12.86,54.77 v12.86,80.33 | v32.07,59.53 31.75,59.85 31.75,67.79 29.05,70.48 v29.05,80.96
  Bottom 0.152: U100.13 34.61,54.61 34.61,54.13 35.4,53.34 37.15,53.34 37.15,58.58 36.35,59.37 C107.1 36.2,59.53 33.81,59.53 R137.2 33.66,59.53 v32.07,59.53 | v13.02,29.84 3.65,29.84 R128.1 | v12.86,80.33 16.51,80.33 17.14,80.96 R143.1 17.3,80.96 v29.05,80.96
N$61
  Bottom 0.152: IC100.10 12.22,14.76 12.22,13.65 8.41,13.65 R110.2 8.26,13.49 4.76,13.49 4.76,3.81 5.71,2.86 7.14,2.86 8.1,1.91 R106.1
N$62
  Bottom 0.152: 17.78,33.02 18.41,33.66 D101.C 18.41,33.81 18.41,34.92 16.51,36.83 16.51,38.73 Q101.B | R122.2 17.78,33.02 | 17.78,33.02 20,33.02 20.8,32.23 R118.2
N$64  (via drill 0.25)
  Top 0.152: v17.14,15.72 17.14,44.13 16.83,44.45 v16.83,48.26
  Bottom 0.152: v17.14,15.72 11.75,15.72 11.75,14.92 IC100.9 | v16.83,48.26 15.56,48.26 R135.1
N$65
  Bottom 0.152: 31.27,33.5 29.84,33.5 R117.2 | 31.27,33.5 32.23,33.5 D100.C 32.38,33.34 33.97,33.34 34.45,32.86 R116.2 | 31.27,33.5 31.27,38.73 Q100.B
N$66
  Bottom 0.152: L102.2 35.4,104.62 35.4,102.39 C130.1 35.24,102.23 32.54,102.23 IC1.1
N$68
  Bottom 0.152: IC101.23 35.4,67.79 35.4,69.37 36.51,69.37 R142.1
N$86  (via drill 0.25)
  Top 0.152: v21.59,23.02 21.75,22.86 v21.75,12.06
  Bottom 0.152: J12.P3 37.47,7.14 38.42,8.1 R100.1 38.42,8.26 38.1,8.26 34.29,12.06 v21.75,12.06 | v21.59,23.02 19.84,23.02 R119.1
N$87  (via drill 0.25)
  Top 0.152: v8.73,46.67 8.73,38.58 10.79,36.51 10.79,25.4 v13.02,23.18
  Bottom 0.152: 21.91,23.81 21.11,24.61 19.84,24.61 R119.2 | 21.91,23.81 22.54,23.18 C102.1 | 21.91,23.81 17.78,23.81 17.14,23.18 R120.1 16.99,23.02 14.29,23.02 R123.1 14.13,23.18 v13.02,23.18 | v8.73,46.67 9.21,46.67 9.21,47.47 9.84,48.1 U102.2
N$93  (via drill 0.25)
  Top 0.152: v30.8,24.61 30.8,18.41 31.11,18.1 31.11,14.13 32.07,13.18 v32.07,8.26 | v6.19,49.85 6.19,42.86 4.6,41.27 v4.6,30.48
  Bottom 0.152: v30.8,24.61 22.7,24.61 C102.2 22.54,24.77 22.07,24.77 22.07,27.15 18.73,30.48 v4.6,30.48 | v32.07,8.26 36.67,8.26 R100.2 | v6.19,49.85 10.48,49.85 10.48,48.9 11.11,48.26 U102.1
N$101  (via drill 0.25)
  Top 0.152: v24.77,62.87 24.92,63.02 24.92,72.71 26.19,73.98 26.19,92.71 v25.88,93.03
  Bottom 0.152: v24.77,62.87 25.08,62.55 27.3,62.55 28.73,63.98 30.8,63.98 30.8,62.39 IC101.9 | v25.88,93.03 16.03,93.03 9.53,99.54 MODE_A.GREEN_C
N_U
  Bottom 0.152: U100.7 28.26,49.53 29.37,49.53 U100.6
POTS_ADDR_A
  Bottom 0.152: IC102.11 6.19,70.96 6.19,71.75 4.76,71.75 4.6,71.6 4.6,66.36 10.32,66.36 13.34,63.34 13.34,59.69 15.08,59.69 U101.13
POTS_ADDR_B  (via drill 0.25)
  Top 0.152: v17.14,64.61 v17.14,69.22
  Bottom 0.152: v17.14,69.22 10.48,69.22 10.32,69.37 5.71,69.37 5.71,70.8 IC102.10 | v17.14,64.61 17.14,63.5 17.3,63.5 U101.18
POTS_ADDR_C  (via drill 0.25)
  Top 0.152: v13.97,68.1 16.51,65.56 16.51,64.45 16.99,63.98 17.94,63.98 v17.94,64.61
  Bottom 0.152: v13.97,68.1 5.08,68.1 5.08,70.8 IC102.9 | v17.94,64.61 17.94,63.5 18.1,63.5 U101.19
RESET  (via drill 0.25)
  Top 0.152: v26.35,51.12 26.35,52.13 26.61,52.39 26.61,56.66 26.86,56.91 26.86,57.98 27.46,58.58 27.46,70.01 26.19,71.28 JP100.4
  Bottom 0.152: U101.4 19.84,54.93 19.84,52.7 21.27,52.7 C109.1 21.43,52.55 22.86,51.12 24.29,51.12 R139.2 24.45,51.12 v26.35,51.12
SW_MODE_A  (via drill 0.25)
  Top 0.152: v20,60.48 20,74.61 18.57,76.04 18.57,79.22 17.3,80.49 17.3,87.63 14.29,90.65 SW_A.3 14.29,90.81 14.29,97.16 SW_A.4
  Bottom 0.152: v20,60.48 23.5,60.48 U101.27
SW_MODE_B  (via drill 0.25)
  Top 0.152: v22.07,58.9 22.07,74.61 23.5,76.04 23.5,79.85 21.91,81.44 21.91,90.49 22.07,90.65 SW_B.3 22.07,90.81 22.07,97.16 SW_B.4
  Bottom 0.152: v22.07,58.9 23.5,58.9 U101.29
SW_MODE_C  (via drill 0.25)
  Top 0.152: v31.91,57.31 31.43,57.78 31.43,67.63 28.42,70.64 28.42,81.12 30.32,83.03 30.32,89.85 29.53,90.65 SW_C.3 29.53,90.81 29.53,97.16 SW_C.4
  Bottom 0.152: v31.91,57.31 31.59,56.99 27.46,56.99 26.67,57.78 23.81,57.78 23.65,57.94 U101.30
SWCLK
  Bottom 0.152: U101.24 22.23,63.5 23.81,65.09 26.67,65.09 27.46,65.88 27.46,68.74 26.19,68.74 JP100.3
SWDIO
  Bottom 0.152: U101.23 21.43,63.5 21.43,65.09 23.34,65.09 24.45,66.2 26.04,66.2 JP100.2
VCC  (via drill 0.25)
  Top 0.152: 5.56,66.67 5.56,72.23 6.19,72.87 6.19,75.25 5.4,76.04 5.4,93.5 6.03,94.14 v6.03,99.38 | 5.56,66.67 v5.56,46.67 | v7.62,40.01 7.94,39.69 7.94,17.3 7.78,17.14 7.78,10.95 9.72,9.02 9.72,5.96 10.64,5.04 10.64,4.11 9.72,3.18 v9.72,1.81 | v2.06,40.01 1.43,40.64 1.43,66.2 1.91,66.67 5.56,66.67
  Bottom 0.152: IC100.4 12.86,9.37 12.86,6.99 C100.1 12.86,6.83 13.34,6.83 13.34,4.13 12.54,3.33 11.91,3.33 11.91,1.27 12.22,0.95 | 12.22,0.95 26.83,0.95 27.15,1.27 U$1.1 | 7.3,46.67 7.3,48.1 U102.4 | 7.3,46.67 7.3,45.72 C106.1 | C133.1 11.43,102.08 9.84,102.08 9.53,101.76 L104.1 9.53,101.6 7.46,99.54 C134.1 7.3,99.38 v6.03,99.38 | v5.56,46.67 7.3,46.67 | 12.22,0.95 10.32,0.95 9.72,1.56 v9.72,1.81 | v2.06,40.01 v7.62,40.01
VEE  (via drill 0.25)
  Top 0.152: v13.65,2.7 13.65,54.45 13.49,54.61 v13.49,55.4 13.18,55.72 13.18,68.1 13.49,68.42 v13.49,88.9
  Bottom 0.152: C129.2 2.86,90.65 5.56,90.65 L101.1 5.71,90.49 7.14,89.06 | 12.22,88.9 12.06,89.06 7.14,89.06 | 12.22,88.9 13.18,87.95 R146.1 | 7.14,89.06 6.83,89.06 5.71,87.95 C128.2 | 7.46,55.56 7.46,53.5 U102.11 | 7.46,55.56 7.46,55.88 8.1,56.52 C112.2 | v13.65,2.7 27.94,2.7 29.21,1.43 U$1.2 | v13.49,55.4 13.34,55.56 7.46,55.56 | v13.49,88.9 12.22,88.9